# EAGLE board eksos-rj45-breakout (EAGLE 7.7.0)

Size 160 x 100 mm. Coordinates in mm from the lower left corner, seen from the top.
Outline: 0,0 160,0 160,100 0,100 0,0
Copper layers (1*16): Top 0.035mm / dielectric 1.5mm / Bottom 0.035mm
Design rules "default": minimum track width 10mil, minimum drill 24mil, track to track 8mil, track to pad 8mil, pad to pad 8mil, via to via 8mil, smd to smd 8mil, copper to edge 40mil, drill to drill 8mil, minimum pad ring 10mil, minimum via ring 8mil, stop-mask expansion 4mil, vias tented up to drill 0mil, thermal gap 10mil

## Footprints (pad centres in the part's own frame; a part is rotated, then mirrored left to right if it is on the bottom)
ML64 = drill 0.914 octagon: 1 -39.37,-1.27; 2 -39.37,1.27; 3 -36.83,-1.27; 4 -36.83,1.27; 5 -34.29,-1.27; 6 -34.29,1.27; 7 -31.75,-1.27; 8 -31.75,1.27; 9 -29.21,-1.27; 10 -29.21,1.27; 11 -26.67,-1.27; 12 -26.67,1.27; 13 -24.13,-1.27; 14 -24.13,1.27; 15 -21.59,-1.27; 16 -21.59,1.27; 17 -19.05,-1.27; 18 -19.05,1.27; 19 -16.51,-1.27; 20 -16.51,1.27; 21 -13.97,-1.27; 22 -13.97,1.27; 23 -11.43,-1.27; 24 -11.43,1.27; 25 -8.89,-1.27; 26 -8.89,1.27; 27 -6.35,-1.27; 28 -6.35,1.27; 29 -3.81,-1.27; 30 -3.81,1.27; 31 -1.27,-1.27; 32 -1.27,1.27; 33 1.27,-1.27; 34 1.27,1.27; 35 3.81,-1.27; 36 3.81,1.27; 37 6.35,-1.27; 38 6.35,1.27; 39 8.89,-1.27; 40 8.89,1.27; 41 11.43,-1.27; 42 11.43,1.27; 43 13.97,-1.27; 44 13.97,1.27; 45 16.51,-1.27; 46 16.51,1.27; 47 19.05,-1.27; 48 19.05,1.27; 49 21.59,-1.27; 50 21.59,1.27; 51 24.13,-1.27; 52 24.13,1.27; 53 26.67,-1.27; 54 26.67,1.27; 55 29.21,-1.27; 56 29.21,1.27; 57 31.75,-1.27; 58 31.75,1.27; 59 34.29,-1.27; 60 34.29,1.27; 61 36.83,-1.27; 62 36.83,1.27; 63 39.37,-1.27; 64 39.37,1.27
RC01077 = drill 0.9: A1 25.4,-12.95; A2 24.13,-15.49; A3 22.86,-12.95; A4 21.59,-15.49; A5 20.32,-12.95; A6 19.05,-15.49; A7 17.78,-12.95; A8 16.51,-15.49; AL1 25.4,-6.35; AL2 24.13,-8.89; AL3 22.86,-6.35; AL4 21.59,-8.89; AL5 20.32,-6.35; AL6 19.05,-8.89; AL7 17.78,-6.35; AL8 16.51,-8.89; B1 11.43,-12.95; B2 10.16,-15.49; B3 8.89,-12.95; B4 7.62,-15.49; B5 6.35,-12.95; B6 5.08,-15.49; B7 3.81,-12.95; B8 2.54,-15.49; BL1 11.43,-6.35; BL2 10.16,-8.89; BL3 8.89,-6.35; BL4 7.62,-8.89; BL5 6.35,-6.35; BL6 5.08,-8.89; BL7 3.81,-6.35; BL8 2.54,-8.89; C1 -2.54,-12.95; C2 -3.81,-15.49; C3 -5.08,-12.95; C4 -6.35,-15.49; C5 -7.62,-12.95; C6 -8.89,-15.49; C7 -10.16,-12.95; C8 -11.43,-15.49; CL1 -2.54,-6.35; CL2 -3.81,-8.89; CL3 -5.08,-6.35; CL4 -6.35,-8.89; CL5 -7.62,-6.35; CL6 -8.89,-8.89; CL7 -10.16,-6.35; CL8 -11.43,-8.89; DL1 -16.51,-6.35; DL2 -17.78,-8.89; DL3 -19.05,-6.35; DL4 -20.32,-8.89; DL5 -21.59,-6.35; DL6 -22.86,-8.89; DL7 -24.13,-6.35; DL8 -25.4,-8.89; DU1 -16.51,-12.95; DU2 -17.78,-15.49; DU3 -19.05,-12.95; DU4 -20.32,-15.49; DU5 -21.59,-12.95; DU6 -22.86,-15.49; DU7 -24.13,-12.95; DU8 -25.4,-15.49 | drill 1.6: SHLD1 -29.5,4.57; SHLD2 -29.175,-5.85; SHLD3 -29.5,-11.43; SHLD4 29.5,4.57; SHLD5 29.175,-9.15; SHLD6 29.5,-15.5 | hole 3.25: -26.85,0; 26.85,0

## Placement (x,y rotation side)
SV1  [ML64]  31.75,36.83 180 top
X1  RJ45-8X-RC1077  [RC01077]  31.75,7.62 180 top

## Library data of the parts
SV1 = con-harting-ml; OC_FARNELL: unknown; OC_NEWARK: unknown
X1 = stewart-rj45

## Nets
1A: SV1.2 X1.DU3
1C: SV1.1 X1.DU6
3A: SV1.6 X1.DU4
3C: SV1.5 X1.DU5
5A: SV1.10 X1.DL3
5C: SV1.9 X1.DL6
7A: SV1.14 X1.DL4
7C: SV1.13 X1.DL5
9A: SV1.18 X1.CL3
9C: SV1.17 X1.CL6
11A: SV1.22 X1.CL4
11C: SV1.21 X1.CL5
13A: SV1.26 X1.C3
13C: SV1.25 X1.C6
15A: SV1.30 X1.C4
15C: SV1.29 X1.C5
17A: SV1.34 X1.BL3
17C: SV1.33 X1.BL6
19A: SV1.38 X1.BL4
19C: SV1.37 X1.BL5
21A: SV1.42 X1.B3
21C: SV1.41 X1.B6
23A: SV1.46 X1.B4
23C: SV1.45 X1.B5
25A: SV1.50 X1.AL3
25C: SV1.49 X1.AL6
27A: SV1.54 X1.AL4
27C: SV1.53 X1.AL5
29A: SV1.58 X1.A3
29C: SV1.57 X1.A6
31A: SV1.62 X1.A4
31C: SV1.61 X1.A5

## Tracks (layer width: path | path; a pad name or v marks a point on that pad's centre or on a via)
1A  (1 unrouted)
1C  (1 unrouted)
3A  (1 unrouted)
3C  (1 unrouted)
5A  (1 unrouted)
5C  (1 unrouted)
7A  (1 unrouted)
7C  (1 unrouted)
9A  (1 unrouted)
9C  (1 unrouted)
11A  (1 unrouted)
11C  (1 unrouted)
13A  (1 unrouted)
13C  (1 unrouted)
15A  (1 unrouted)
15C  (1 unrouted)
17A  (1 unrouted)
17C  (1 unrouted)
19A  (1 unrouted)
19C  (1 unrouted)
21A  (1 unrouted)
21C  (1 unrouted)
23A  (1 unrouted)
23C  (1 unrouted)
25A  (1 unrouted)
25C  (1 unrouted)
27A  (1 unrouted)
27C  (1 unrouted)
29A  (1 unrouted)
29C  (1 unrouted)
31A  (1 unrouted)
31C  (1 unrouted)